# Altium PCB Control_Board_Model_C.PcbDoc (part 7 of 8)
Units mil, origin at the board's own origin, x right, y up, seen from the top; angles counter-clockwise.
Board outline 3417.32 x 2110.24 mil, 6 copper layers (1-SIG-TOP, 2-GND, 3-PWR, 4-SIG-HOR, 5-SIG-VERT, 6-GND-BOT), stack 46.063 mil thick; 420 components, 340 nets, 1596 pads, 39 vias.
Unrouted connection lines stored in the file: 362.
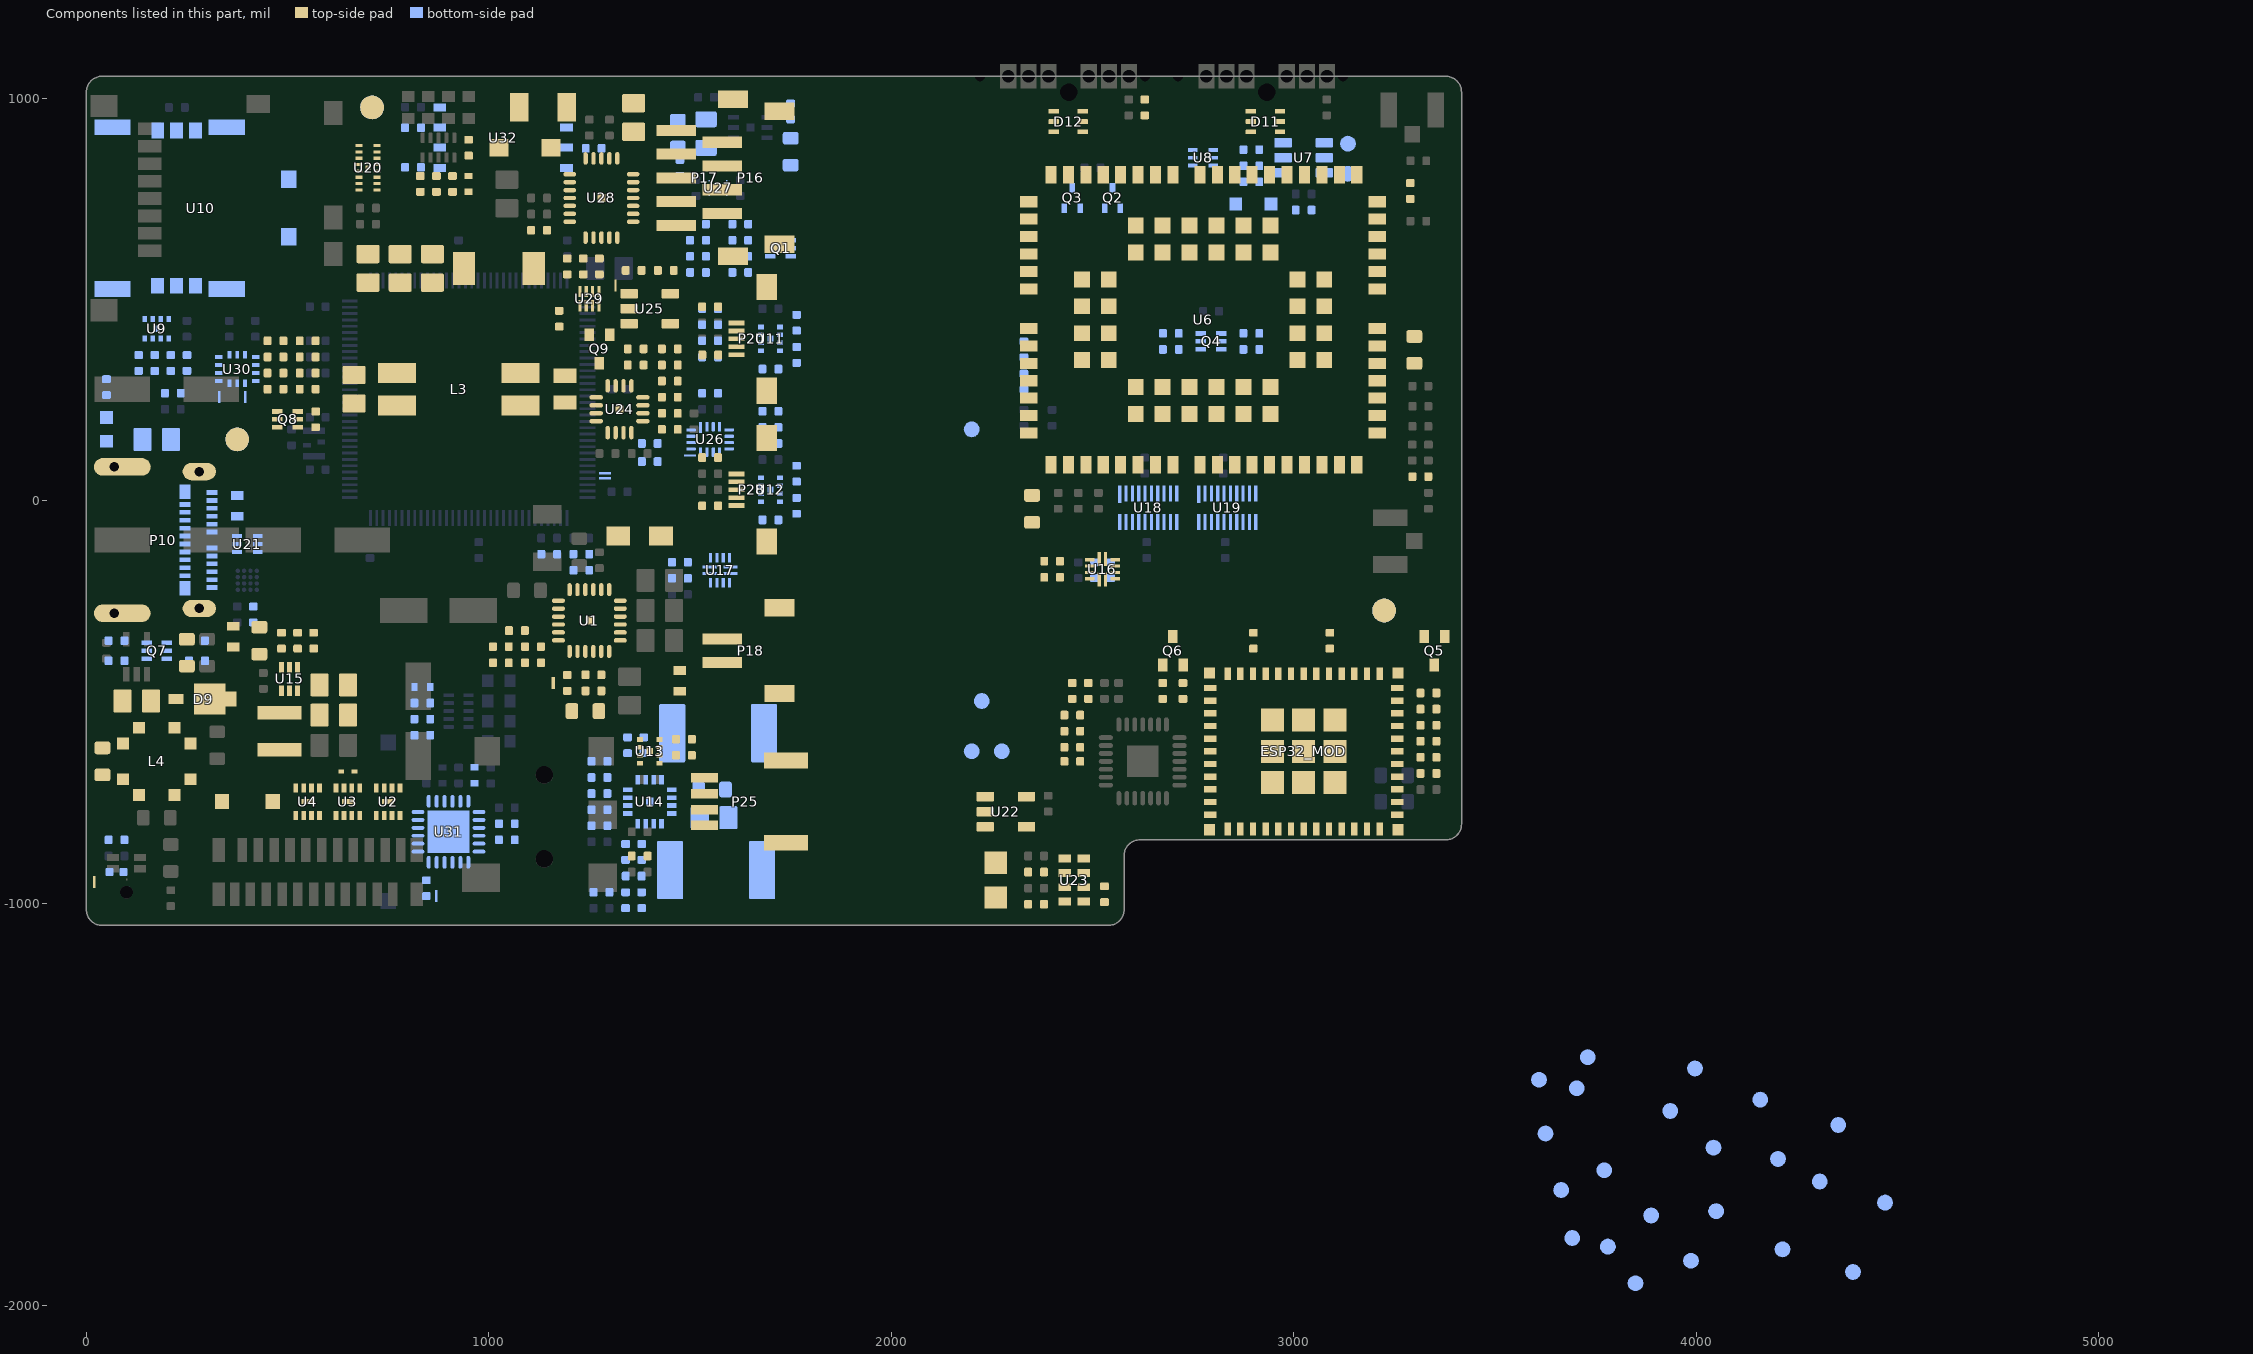
[diagram p7: the components of this part, seen from the top]

## Part data (continued)
U22: library part "IC 24LC00T-I/OT EEPROM 128 I2C SOT23-5", "EEPROM Memory IC 128b (16 x 8) I²C 400kHz 3500ns SOT-23-5", Case/Package=SOT-23, Frequency=400kHz, Manufacturer=Microchip, Max Operating Temperature=85°C, Max Supply Voltage=5.5V, Min Operating Temperature=-40°C, Min Supply Voltage=2.5V, Nominal Supply Current=2mA, Package Quantity=3000, Supplier Part Number 1=24LC00T-I/OTCT-ND, Access Time=900ns, ComponentLink1Description=http://www.farnell.com/datasheets/1669367.pdf?src-supplier=Element14, ComponentLink1URL=http://www.farnell.com/datasheets/1669367.pdf?src-supplier=Element14, ComponentLink2Description=http://ww1.microchip.com/downloads/en/DeviceDoc/21178H.pdf?src-supplier=Avnet+Europe, ComponentLink2URL=http://ww1.microchip.com/downloads/en/DeviceDoc/21178H.pdf?src-supplier=Avnet+Europe, ComponentLink3Description=http://www.microchip.com/mymicrochip/filehandler.aspx?ddocname=en011773&src-supplier=Future+Electronics, ComponentLink3URL=http://www.microchip.com/mymicrochip/filehandler.aspx?ddocname=en011773&src-supplier=Future+Electronics, ComponentLink4Description=https://www.distrelec.biz/Web/Downloads/_t/ds/24AA00_24LC00_24C00_eng_tds.pdf?mime=application%2Fpdf&src-supplier=Distrelec, ComponentLink4URL=https://www.distrelec.biz/Web/Downloads/_t/ds/24AA00_24LC00_24C00_eng_tds.pdf?mime=application%2Fpdf&src-supplier=Distrelec, ComponentLink5Description=https://www.verical.com/server-webapp/html/getDatasheet?partID=790518&src-supplier=Verical, ComponentLink5URL=https://www.verical.com/server-webapp/html/getDatasheet?partID=790518&src-supplier=Verical, ComponentLink6Description=http://www.produktinfo.conrad.com/datenblaetter/1000000-1099999/001085284-da-01-en-IC_EEPROM_128B_24LC00T_I_OT_SOT_23_5_MCP.pdf?src-supplier=Conrad, ComponentLink6URL=http://www.produktinfo.conrad.com/datenblaetter/1000000-1099999/001085284-da-01-en-IC_EEPROM_128B_24LC00T_I_OT_SOT_23_5_MCP.pdf?src-supplier=Conrad, Contact Plating=Tin,Matte, Density=128b, Height=1.3mm, Interface=I2C,2-Wire,Serial, Lead Free="Lead Free", Length=3.1mm, Manufacturer Part Number=24LC00T-I/OT, Max Frequency=400kHz, Memory Size=128b, Memory Type=EEPROM, Mount="Surface Mount", Number of Pins=5, Packaging="Tape and Reel", Pricing 1="1=0.19, 100=0.1785 (USD)", Radiation Hardening=No, REACH SVHC="No SVHC", Stock 1=29747, Supplier 1=Digi-Key, Width=1.8mm
U23: library part "IC RV-3028 RTC CLK/CALENDAR I2C 8-SMT", "2-Bit Bidirectional Voltage-Level Translator for Open-Drain Application", Manufacturer="Micro Crystal", Supplier Part Number 1=2195-RV-3028-C732.768KHZ1PPM-TA-QCCT-ND, Manufacturer Part Number="RV-3028-C7 32.768KHZ 1PPM-TA-QC", Mount="Surface Mount", Pricing 1="1=2.71, 10=2.435, 25=2.3016, 100=1.9949, 250=1.8926, 500=1.6982 (USD)", Stock 1=4121, Supplier 1=Digi-Key
U24: library part "IC TPS55340RTET REG BOOST ADJ 5.25A 16WQFN", "Boost Switching Regulator IC Positive, Isolation Capable Adjustable 2.9V 1 Output 5.25A (Switch) 16-WFQFN Exposed Pad", Manufacturer="Texas Instruments", Max Input Voltage=32V, Max Operating Temperature=150°C, Max Output Current=5A, Max Output Voltage=38V, Min Input Voltage=2.9V, Min Operating Temperature=-40°C, Package Quantity=1, Quiescent Current=500uA, Supplier Part Number 1=296-30530-1-ND, Switching Frequency=1.14MHz, ComponentLink1Description=http://www.ti.com/general/docs/lit/getliterature.tsp?genericPartNumber=TPS55340&amp;&amp;fileType=pdf&src-supplier=Newark, ComponentLink1URL=http://www.ti.com/general/docs/lit/getliterature.tsp?genericPartNumber=TPS55340&amp;&amp;fileType=pdf&src-supplier=Newark, ComponentLink2Description=http://www.ti.com/general/docs/lit/getliterature.tsp?genericPartNumber=TPS55340&&fileType=pdf&src-supplier=Avnet, ComponentLink2URL=http://www.ti.com/general/docs/lit/getliterature.tsp?genericPartNumber=TPS55340&&fileType=pdf&src-supplier=Avnet, ComponentLink3Description=http://www.farnell.com/datasheets/2019229.pdf?src-supplier=Element14, ComponentLink3URL=http://www.farnell.com/datasheets/2019229.pdf?src-supplier=Element14, ComponentLink4Description=http://www.ti.com/lit/ds/symlink/tps55340.pdf?src-supplier=Avnet+Europe, ComponentLink4URL=http://www.ti.com/lit/ds/symlink/tps55340.pdf?src-supplier=Avnet+Europe, Height=0.72mm, Lead Free="Lead Free", Length=3.15mm, Manufacturer Part Number=TPS55340RTET, Min Output Voltage=2.9V, Mount="Surface Mount", Number of Outputs=1, Number of Pins=16, Output Current=5A, Output Type=Adjustable, Output Voltage=38V, Packaging="Tape and Reel", Pricing 1="1=3.76, 10=3.372, 25=3.1884, 100=2.6215 (USD)", Radiation Hardening=No, REACH SVHC="No SVHC", Stock 1=6832, Supplier 1=Digi-Key, Synchronous Rectifier=No, Topology=Boost,Flyback,SEPIC, Width=3.15mm
U25: library part "IC OPA171 OPAMP GP 1 CIRCUIT SOT-23-5", "General Purpose Amplifier 1 Circuit Rail-to-Rail SOT-23-5", Case/Package=SOT-23-5, Input Bias Current=15pA, Input Offset Voltage (Vos)=250uV, Manufacturer="Texas Instruments", Max Dual Supply Voltage=18V, Max I/O Voltage=1.8mV, Max Operating Temperature=125°C, Max Supply Voltage=36V, Min Dual Supply Voltage=1.35V, Min Operating Temperature=-40°C, Min Supply Voltage=2.7V, Nominal Supply Current=475uA, Output Current=25mA, Output Current per Channel=35mA, Package Quantity=3000, Power Supply Rejection Ratio (PSRR)=120dB, Supplier Part Number 1=296-37698-1-ND, Voltage Gain=130dB, Bandwidth=3MHz, Common Mode Rejection Ratio=104dB, ComponentLink1Description=http://www.ti.com/lit/ds/symlink/opa171.pdf?src-supplier=Digi-Key, ComponentLink1URL=http://www.ti.com/lit/ds/symlink/opa171.pdf?src-supplier=Digi-Key, Contact Plating=Gold, Gain Bandwidth Product=3MHz, Lead Free="Lead Free", Manufacturer Part Number=OPA171AIDBVR, Mount="Surface Mount", Nominal Gain Bandwidth Product=3MHz, Number of Amplifiers=1, Number of Channels=1, Number of Circuits=1, Number of Elements=1, Number of Pins=5, Operating Supply Current=475uA, Operating Supply Voltage=18V, Packaging="Tape and Reel", Pricing 1="1=1.36, 10=1.215, 100=0.9476, 500=0.7828, 1000=0.618 (USD)", Radiation Hardening=No, REACH SVHC="No SVHC", Slew Rate=1.5V/µs, Stock 1=126525, Supplier 1=Digi-Key, Unity Gain Bandwidth Product=3MHz
U26: library part "IC TS3USBCA410IRSVT SBU MUX 3TO1 W/ MIC AND GNDIND T", "USB Switch IC 1 Channel 16-UQFN (2.6x1.8)", Manufacturer="Texas Instruments", Max Operating Temperature=85°C, Min Operating Temperature=-40°C, Supplier Part Number 1=296-52158-1-ND, ComponentLink1Description=Datasheet, ComponentLink1URL=https://www.ti.com/lit/gpn/ts3usbca4, Manufacturer Part Number=TS3USBCA410IRSVT, Mount="Surface Mount", Number of Channels=3, Pricing 1="1=1.07, 10=0.959, 25=0.91, 100=0.6988 (USD)", Stock 1=250, Supplier 1=Digi-Key
U27: library part "IC LDLN025 REG LINEAR 1.8V 250MA 4DFN", "Linear Voltage Regulator IC 1 Output 250mA 4-DFN (1x1)", Case/Package=DFN, Dropout Voltage=250mV, Manufacturer=STMicroelectronics, Max Input Voltage=5.5V, Max Operating Temperature=125°C, Max Supply Current=425uA, Min Operating Temperature=-40°C, Min Output Voltage=1.8V, Output Current=250mA, Power Supply Rejection Ratio (PSRR)=60dB, Quiescent Current=25uA, Supplier Part Number 1=497-17000-1-ND, ComponentLink1Description=http://www.st.com/content/ccc/resource/technical/document/datasheet/group3/a7/8d/6a/ac/ed/d0/4f/f4/DM00312779/files/DM00312779.pdf/jcr:content/translations/en.DM00312779.pdf?src-supplier=Digi-Key, ComponentLink1URL=http://www.st.com/content/ccc/resource/technical/document/datasheet/group3/a7/8d/6a/ac/ed/d0/4f/f4/DM00312779/files/DM00312779.pdf/jcr:content/translations/en.DM00312779.pdf?src-supplier=Digi-Key, Manufacturer Part Number=LDLN025PU18R, Mount="Surface Mount", Number of Regulators=1, Output Configuration=Positive, Output Type=Fixed, Packaging="Tape and Reel", Pricing 1="1=0.61, 10=0.525, 25=0.49, 100=0.364, 250=0.308, 500=0.294, 1000=0.217, 2500=0.203 (USD)", Stock 1=4322, Supplier 1=Digi-Key
U28: library part "IC DRV10975Z BLDC MOTOR DRIVER VQFN-24", "Multiphase Motor Driver Power MOSFET Analog, I²C, PWM 24-VQFN (5x4)", Manufacturer="Texas Instruments", Maximum Operating Temperature="+ 125 C", Minimum Operating Temperature="- 40 C", Operating Frequency="100 kHz", Operating Supply Current="5 mA", Operating Supply Voltage="6.5 V to 18 V", Operating Temperature Range="- 40 C to + 125 C", Output Current="1.5 A", Output Voltage="19 V", Package / Case=VQFN-24, Supplier Part Number 1=296-50214-1-ND, Brand="Texas Instruments", Category="Motor / Motion / Ignition Controllers & Drivers", Development Kit=DRV10975EVM, Features="Buck Step Down Converter, Initial Position Detect (IPD), Rotor Lock Protection, SPI/I2C, Integrated", Manufacturer Part Number=DRV10975ZRHFR, Minimum Order Quantity=1, Moisture Sensitive=Yes, Mount="Surface Mount", Number of Outputs="3 Output", Packaging="Cut Tape", Pricing 1="1=2.73, 10=2.31, 100=1.85, 250=1.62, 500=1.58, 1000=1.25, 3000=1.21, 6000=1.16, 9000=1.14 (USD)", Product="Brushless DC Motor Controllers", Product Type="Motor / Motion / Ignition Controllers & Drivers", Reeling=True, RoHS="RoHS Compliant", RoHS - Mouser=Y, Series=DRV10975, Standard Pack Qty=3000, Stock 1=2979, Subcategory="PMIC - Power Management ICs", Supplier 1=Digi-Key, Type="Half Bridge"
U29: library part "IC TXS0102 TRNSLTR BIDIRECTIONAL 8X2SON", "2-Bit Bidirectional Voltage-Level Translator for Open-Drain Application", High Level Output Current=-20uA, Low Level Output Current=1mA, Manufacturer="Texas Instruments", Max Operating Temperature=85°C, Max Supply Voltage=5.5V, Min Operating Temperature=-40°C, Min Supply Voltage=1.65V, Package Quantity=1, Quiescent Current=14.4uA, Supplier Part Number 1=296-28435-1-ND, ComponentLink1Description=https://www.verical.com/server-webapp/html/getDatasheet?partID=544149&src-supplier=Verical, ComponentLink1URL=https://www.verical.com/server-webapp/html/getDatasheet?partID=544149&src-supplier=Verical, ComponentLink2Description=http://www.ti.com/general/docs/suppproductinfo.tsp?distId=10&gotoUrl=http%3A%2F%2Fwww.ti.com%2Flit%2Fgpn%2Ftxs0102&src-supplier=Digi-Key, ComponentLink2URL=http://www.ti.com/general/docs/suppproductinfo.tsp?distId=10&gotoUrl=http%3A%2F%2Fwww.ti.com%2Flit%2Fgpn%2Ftxs0102&src-supplier=Digi-Key, Contact Plating=Gold, Data Rate=24Mbps, Height=0.35mm, Lead Free="Lead Free", Length=1.85mm, Logic Function=Translator, Manufacturer Part Number=TXS0102DQMR, Mount="Surface Mount", Number of Bits=2, Number of Channels=2, Number of Inputs=2, Number of Pins=8, Output Type=Voltage, Packaging="Tape and Reel", Pricing 1="1=0.69, 10=0.611, 25=0.5736, 100=0.4681, 250=0.4348, 500=0.37, 1000=0.296 (USD)", Propagation Delay=260ns, Radiation Hardening=No, REACH SVHC="No SVHC", Stock 1=53273, Supplier 1=Digi-Key, Turn-On Delay Time=4.6ns, Width=1.25mm
U30: library part "IC BMI270 IMU ACCEL/GYRO I2C/SPI 14LGA", "Accelerometer, Gyroscope, 6 Axis Sensor I²C, SPI Output", Manufacturer="Bosch Sensortec", Supplier Part Number 1=828-1091-1-ND, Manufacturer Part Number=BMI270, Pricing 1="1=5.75, 5=5.07, 10=4.478, 25=3.6336, 50=3.211, 100=3.1265, 500=2.6195, 1000=2.4505 (USD)", Stock 1=0, Supplier 1=Digi-Key
U31: library part "IC CMX655DQ6-TR1K VOICE CODEC 16BIT 24VQFN", "Voice-Band Interface 16 b I²S, PCM, SPI 24-VQFN (4x4)", Case/Package=VQFN, Manufacturer="CML Microcircuits", Supplier Part Number 1=226-CMX655DQ6, ComponentLink1Description=https://www.cmlmicro.com/wp-content/uploads/2018/10/CMX655_ds.pdf?src-supplier=Digi-Key, ComponentLink1URL=https://www.cmlmicro.com/wp-content/uploads/2018/10/CMX655_ds.pdf?src-supplier=Digi-Key, Manufacturer Part Number=CMX655DQ6, Mount="Surface Mount", Packaging="Cut Tape", Pricing 1="1=1.41, 10=1.41, 50=1.36, 100=1.22, 1000=1.07, 10000=1.01 (USD)", Stock 1=164, Supplier 1=Mouser, Supplier 2=Digi-Key, Supplier Part Number 2=2032-1036-1-ND
U32: library part "IC MT29F1G01ABAFDWB FLASH 1GBIT SPI 8UPDFN", "FLASH - NAND Memory IC 1Gb (1G x 1) SPI   8-U-PDFN (8x6)", Manufacturer="Micron Technology", Max Operating Temperature=85°C, Min Operating Temperature=-40°C, Supplier Part Number 1=557-1654-1-ND, Interface=SPI,Serial, Manufacturer Part Number="MT29F1G01ABAFDWB-IT:F TR", Memory Type=FLASH,NAND, Number of Pins=8, Packaging="Tape and Reel", Pricing 1="1=2.68, 10=2.414, 25=2.3768, 50=2.3704, 100=2.1181, 250=2.0485, 500=2.041, 1000=1.9006 (USD)", Stock 1=2188, Supplier 1=Digi-Key